# Altium PCB U_I_Meter_WIFI.PcbDoc
Units mm, origin at the board's own origin, x right, y up, seen from the top; angles counter-clockwise.
Board outline 66.83 x 47.73 mm, 2 copper layers (Top Layer, Bottom Layer), stack 1.071 mm thick; 26 components, 17 nets, 120 pads, 16 vias.
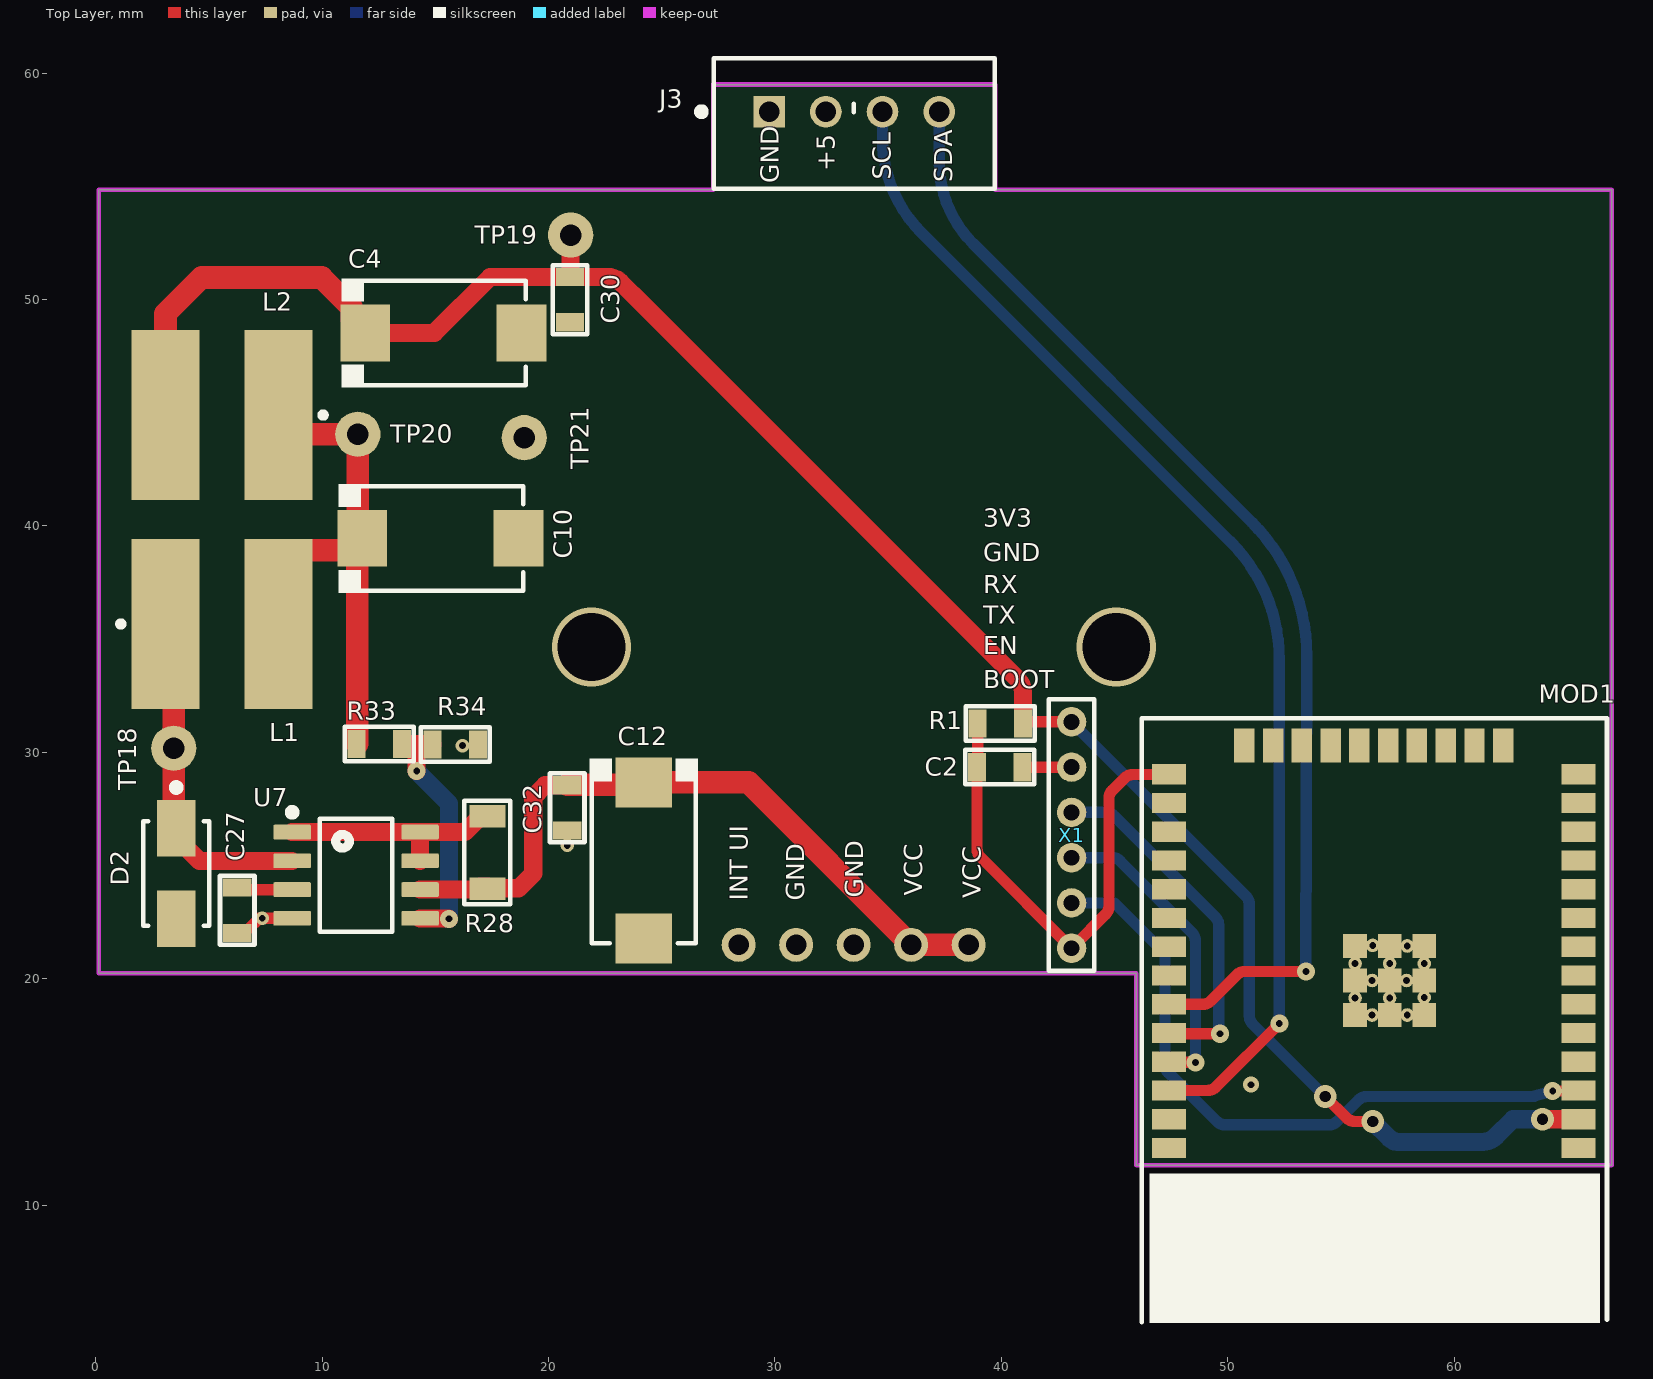
[diagram p0: Top Layer view]
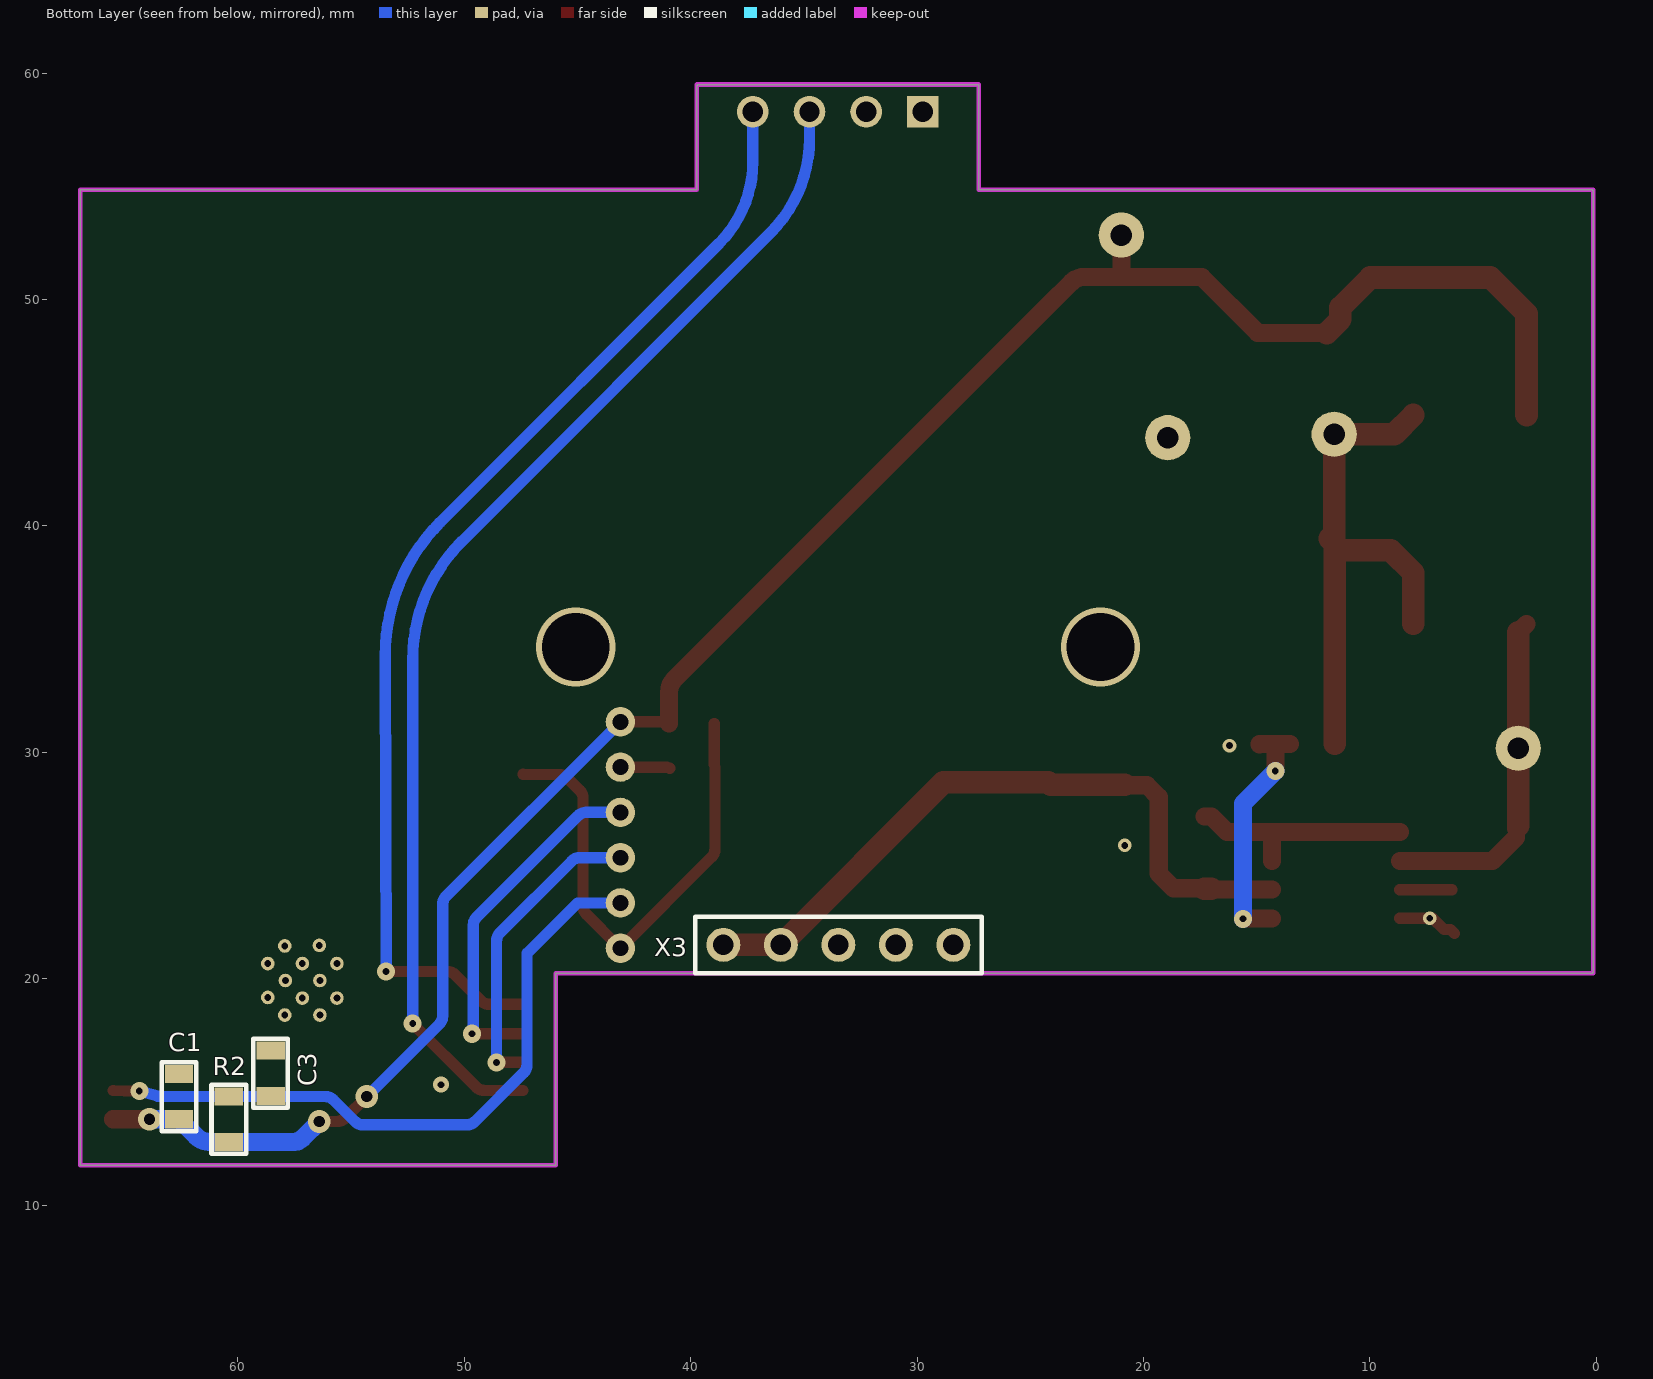
[diagram p1: Bottom Layer view, seen from below]
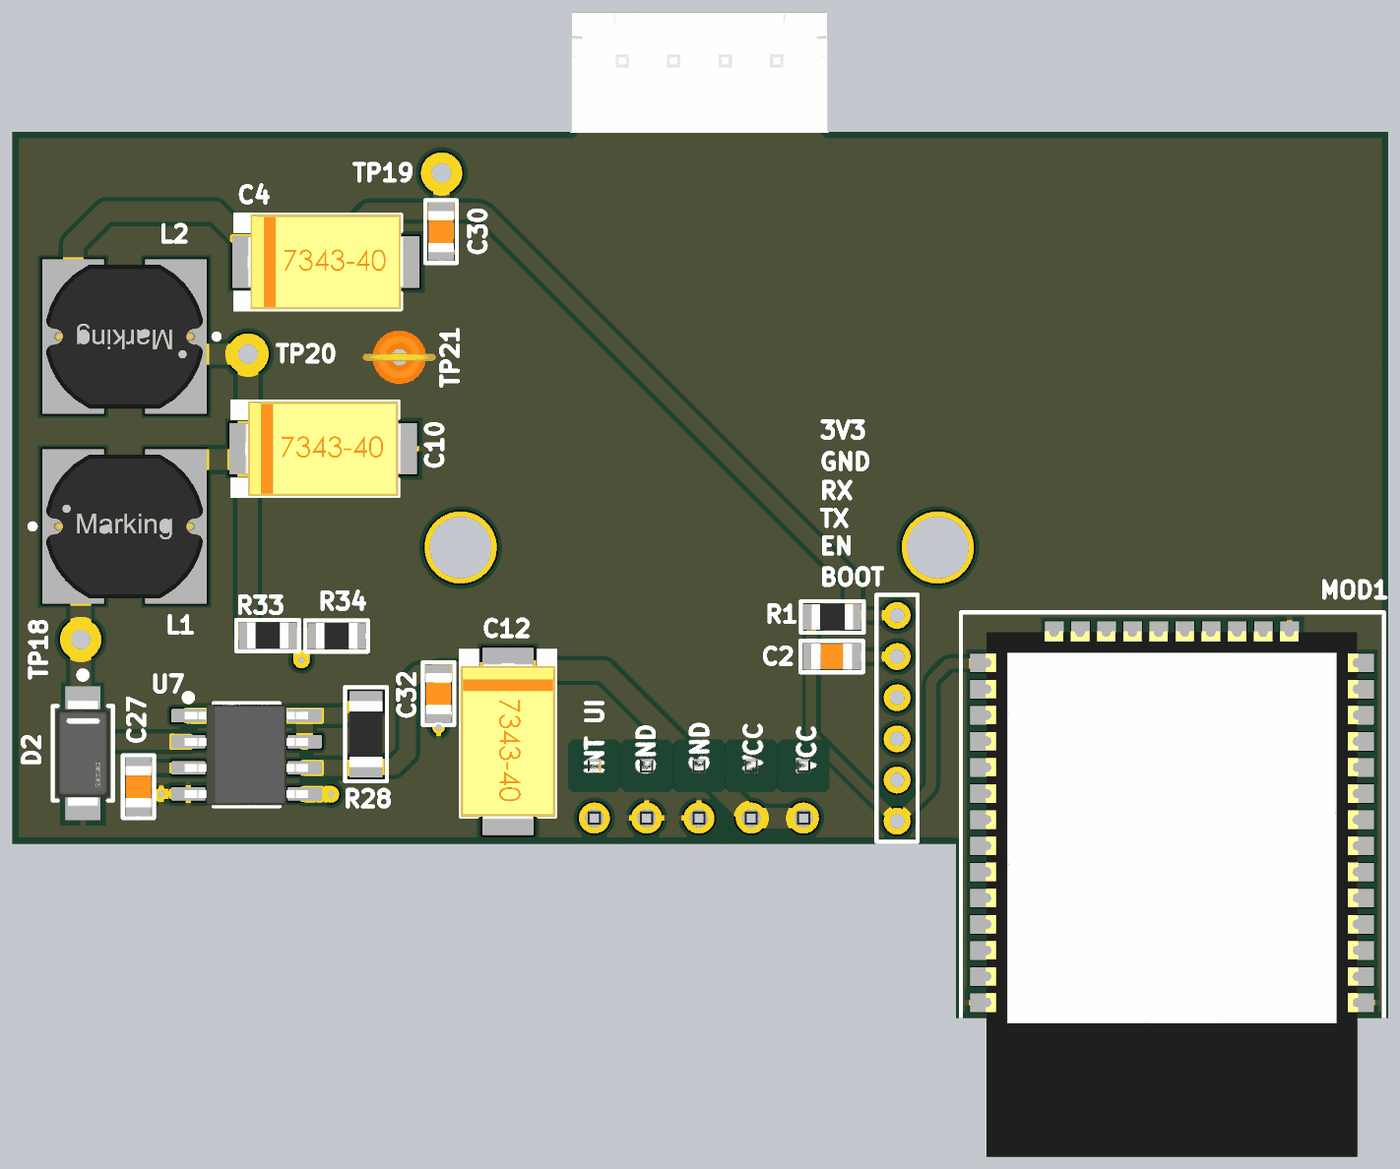
[diagram p2: 3D render of the assembled board from above, using the file's embedded part models]
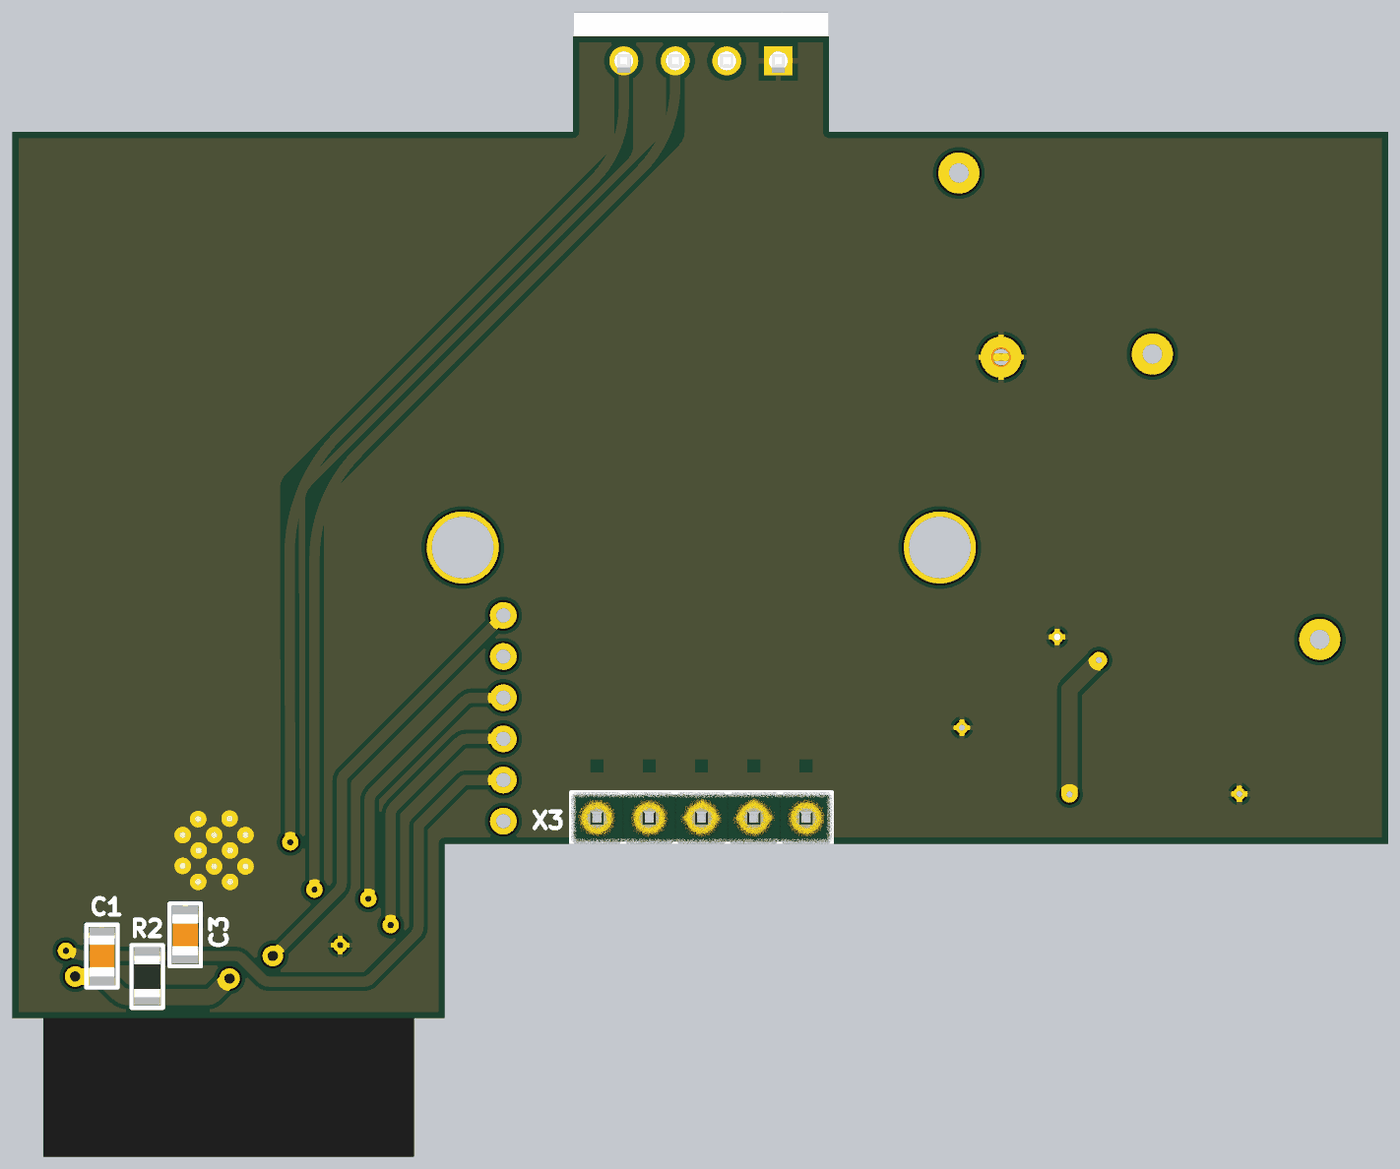
[diagram p3: 3D render of the assembled board from below, using the file's embedded part models]

## Layer stack, top to bottom
Top Solder: solder mask 0.0102, Solder Resist, Dk 3.5
Top Layer: signal copper 0.0356
Dielectric 1: dielectric 1, FR-4, Dk 4.8
Bottom Layer: signal copper 0.0356
Bottom Solder: solder mask 0.0102, Solder Resist, Dk 3.5

## Board outline
0.125,20.25 0.125,54.85 27.275,54.85 27.275,59.5 39.725,59.5 39.725,54.85 66.95,54.85 66.95,11.775 45.95,11.775 45.95,20.25

## Design rules (kind name [scope] priority, off if disabled: settings)
Clearance [All] p1: gap=0.2 ignorepadtopadclearanceinfootprint=FALSE except(0.254: THPad-THPad THPad-Via THPad-Fill THPad-Poly THPad-Region THPad-Text THPad-Hole Via-Via Via-Fill Via-Poly Via-Region Via-Text Via-Hole Fill-Fill Fill-Poly Fill-Region Fill-Text Fill-Hole Poly-Poly Poly-Region Poly-Text Poly-Hole Region-Region Region-Text Region-Hole Text-Text Text-Hole)
ComponentClearance [All] p1: gap=-1 collisioncheckmode=3 verticalgap=0 showdistances=FALSE
Height [All] p1: minheight=-1 maxheight=100 prefheight=12.7
PolygonConnect [All] p1: connectstyle=Relief reliefconductorwidth=0.254 reliefentries=4 polygonreliefangle="90 Angle" airgapwidth=0.254
RoutingVias [All] p1: holewidth=0.711 width=1.27 viastyle="Through Hole" minholewidth=0.711 minwidth=1.27 maxholewidth=0.711 maxwidth=1.27
SolderMaskExpansion [All] p1: expansion=0.102 istentingtop=FALSE
Width [All] p1: maxlimit=10 minlimit=0.254 preferedwidth=0.254 minimp=50.000000 maximp=50.000000 favimp=50.000000
28 further rules are at their usual default settings.

## Components (designator, comment, footprint, x,y, rotation, side; value= is the part's Value field where it differs from the comment)
C1 "0.1uF" CAP-0805 62.597,14.796 r270 bottom
C2 "100nF" CAP-0805 39.925,29.35 r180 top
C3 "100nF" CAP-0805 58.55,15.825 r90 bottom
C4 "100uF_16V" CAP-TAN-D 15.35,48.525 r0 top
C10 "100uF_16V" CAP-TAN-D 15.225,39.45 r0 top
C12 "100uF_16V" CAP-TAN-D 24.2,25.225 r270 top
C27 "470pF" CAP-0805 6.25,23.025 r270 top
C30 "0.1uF" CAP-0805 20.95,50 r90 top
C32 "0.47uF" CAP-0805 20.825,27.55 r270 top
D2 "US1G" US1G_SMA 3.55,24.65 r270 top
J3 "B4B-XH-A(LF)(SN)" B4B-XH-A 33.5,57.775 r180 top
L1 "47µH, 1.17A" WE-PD2_7850 5.575,35.675 r0 top
L2 "47µH, 1.17A" WE-PD2_7850 5.575,44.9 r180 top
MOD1 "MOD-ESP32-WROOM-32E" MOD-ESP32-WROOM-32E 56.45,21.415 r180 top locked
R1 "10K" RES-0805 39.95,31.275 r0 top
R2 "10K" RES-0805 60.4,13.8 r90 bottom
R28 "0.33" RES-1206 17.3,25.575 r90 top
R33 "3.8K" RES-0805 12.525,30.375 r0 top
R34 "1.2K" RES-0805 15.875,30.35 r180 top
TP18 "Test_Point_PCB" Test_Point 3.444,30.181 r90 top
TP19 "Test_Point_PCB" Test_Point 20.975,52.85 r90 top
TP20 "Test_Point_PCB" Test_Point 11.575,44.05 r270 top
TP21 "Test_Point_PCB" Pin_Test_Point(Orange) 18.925,43.9 r90 top
U7 "MC34063" SOIC-8_M 11.5,24.575 r0 top
X1 "CONN-6-PIN" CONN-PLS-6-2.00mm 43.1,31.35 r270 top
X3 "CONN-5-PIN" CONN-PLS-5-2.54_2 28.395,21.5 r0 bottom locked

## Footprints (in the part's own frame and the unit in brackets; to place one, negate y for a bottom-side part, rotate by r counter-clockwise, add the part's x,y. Pads: shape width x height; smd on the part's side, far side on the other; paste and mask are expansions set on the pad)
B4B-XH-A [mm]
  rect 1.4x1.4 hole 0.9 paste-2539.97 mask+0: 1(3.75,-0.525)
  round 1.4 hole 0.9 paste-2539.97 mask+0: 2(1.25,-0.525) 3(-1.25,-0.525) 4(-3.75,-0.525)
  silkscreen extent -6.2,-2.88 6.87,2.88, body extent -6.3,-2.98 6.3,2.98, height 0.25
CAP-0805 [mm]
  rect 0.8x1.25 smd mask+0.015: 1(-1,0) 2(1,0)
  silkscreen extent -1.52,-0.76 1.52,0.76, body extent -1,-0.62 1,0.63, height 0.8
CAP-TAN-D [mm]
  rect 2.2x2.5 smd: 1(-3.45,0) 2(3.45,0)
  silkscreen extent -4.5,-2.4 3.65,2.4, body extent -3.8,-2.3 3.8,2.3, height 4
CONN-PLS-5-2.54_2 [mm]
  round 1.5 hole 0.9: 1(0,0) 2(2.54,0) 3(5.08,0) 4(7.62,0) 5(10.16,0)
  silkscreen extent -1.25,-1.25 11.41,1.25, body extent -1.27,-3.81 11.43,1.27, height 19.54
CONN-PLS-6-2.00mm [mm]
  round 1.3 hole 0.7: 1(0,0) 2(2,0) 3(4,0) 4(6,0) 5(8,0) 6(10,0)
  silkscreen extent -1,-1 11,1
MOD-ESP32-WROOM-32E [mm]
  rect 1.5x0.9 smd paste+0 mask+0.05: 1(-9.05,8.89) 2(-9.05,7.62) 3(-9.05,6.35) 4(-9.05,5.08) 5(-9.05,3.81) 6(-9.05,2.54) 7(-9.05,1.27) 8(-9.05,0) 9(-9.05,-1.27) 10(-9.05,-2.54) 11(-9.05,-3.81) 12(-9.05,-5.08) 13(-9.05,-6.35) 14(-9.05,-7.62) 25(9.05,-7.62) 26(9.05,-6.35) 27(9.05,-5.08) 28(9.05,-3.81) 29(9.05,-2.54) 30(9.05,-1.27) 31(9.05,0) 32(9.05,1.27) 33(9.05,2.54) 34(9.05,3.81) 35(9.05,5.08) 36(9.05,6.35) 37(9.05,7.62) 38(9.05,8.89)
  rect 0.9x1.5 smd paste+0 mask+0.05: 15(-5.715,-8.89) 16(-4.445,-8.89) 17(-3.175,-8.89) 18(-1.905,-8.89) 19(-0.635,-8.89) 20(0.635,-8.89) 21(1.905,-8.89) 22(3.175,-8.89) 23(4.445,-8.89) 24(5.715,-8.89)
  rect 1.05x1.05 smd paste+0 mask+0.05: 39(-2.225,1.49) 39(-2.225,3.015) 39(-2.225,-0.035) 39(-0.7,3.015) 39(-0.7,1.49) 39(-0.7,-0.035) 39(0.825,3.015) 39(0.825,1.49) 39(0.825,-0.035)
  round 0.6 hole 0.3: 39(-2.225,2.24) 39(-2.225,0.74) 39(-1.475,3.015) 39(-1.475,-0.035) 39(-1.45,1.49) 39(-0.7,2.265) 39(-0.7,0.74) 39(0.05,-0.06) 39(0.075,3.015) 39(0.075,1.49) 39(0.825,2.265) 39(0.825,0.74)
  silkscreen extent -10.3,-10.08 10.25,16.62, body extent -9.04,-9.16 9.04,16.38, height 3
Pin_Test_Point(Orange) [mm]
  round 2 hole 0.95: 1(0,0)
  body extent -1.3,-1.78 1.3,1.78, height 6.93
RES-0805 [mm]
  rect 0.8x1.25 smd mask+0.015: 1(-1,0) 2(1,0)
  silkscreen extent -1.52,-0.76 1.52,0.76, body extent -1,-0.62 1,0.63, height 0.6
RES-1206 [mm]
  rect 1x1.6 smd: 1(-1.6,0) 2(1.6,0)
  silkscreen extent -2.29,-1.02 2.29,1.02, body extent -1.6,-0.8 1.6,0.8, height 0.6
SOIC-8_M [mm]
  rrect15% 1.65x0.65 smd: 1(-2.825,1.905) 2(-2.825,0.635) 3(-2.825,-0.635) 4(-2.825,-1.905) 5(2.825,-1.905) 6(2.825,-0.635) 7(2.825,0.635) 8(2.825,1.905)
  silkscreen extent -2.95,-2.5 1.6,2.9, body extent -3,-2.45 3,2.45, height 1.63
Test_Point [mm]
  round 2 hole 0.95: 1(0,0)
US1G_SMA [mm]
  rect 2.5x1.7 smd paste+0 mask+0: 1(-2,0) 2(2,0)
  silkscreen extent -3.92,-1.46 2.3,1.46, body extent -2.6,-1.3 2.6,1.3, height 2.4
WE-PD2_7850 [mm] "SMD Power Inductor, 2-Leads, body 7.8x7mm"
  rect 3x7.5 smd: 1(-2.5,0) 2(2.5,0)
  silkscreen extent -4.59,-0.12 -4.34,0.12, body extent -3.81,-3.5 3.81,3.5, height 4.95

## Part data
C1 C2 C3 C27 C30 C32: library part CAP-NON-POLAR
C4 C10 C12: library part CAP_POL_SMD
L1 L2: library part 744775147, "WE-PD2 SMT Power Inductor, size 7850, 47µH, 1.17A, 0.18Ω", Case/Size Code=7850, DC Resistance=0.134Ω, DC Resistance Max=0.18Ω, Inductance=47µH, Manufacturer="Wurth Elektronik", Operating Temperature Max=125°C, Operating Temperature Min=-40°C, Rated Current=1.17A, Saturation Current=1.24A, Self Resonant Frequency=12MHz, Category="Unshielded Power Inductors", ComponentLink1Description="Website Link", ComponentLink1URL=https://www.we-online.com/redexpert/article/744775147?ad, ComponentLink2Description="Datasheet Link", ComponentLink2URL=https://www.we-online.com/redexpert/spec/744775147?ad, Height=4.95mm, Length=7.8mm, Manufacturer Part Number=744775147, Match Code=WE-PD2, Mount="Surface Mount", Packaging="Tape and Reel", Width=7mm
R1 R2 R28 R34: library part RES-CONST
R33: library part RES-CONST, "10K"
TP18 TP19 TP20 TP21: library part TP_PCB?, "Test_Point"

## Via types
v1: diameter 0.8, hole 0.3, Top Layer to Bottom Layer, 7 vias
v2: diameter 1, hole 0.5, Top Layer to Bottom Layer, 3 vias
v3: diameter 0.6, hole 0.3, Top Layer to Bottom Layer, 3 vias
v4: diameter 3.5, hole 3, Top Layer to Bottom Layer, 2 vias
v5: diameter 0.7, hole 0.3, Top Layer to Bottom Layer, 1 vias

## Nets (pads, with @x,y where several pads share a name; then routed paths per layer and width w, separated by ;. In a path a pad name is that pad's centre, name@x,y a point inside that pad or via, vN(x,y) a via of type N, cw(c..) or ccw(c..) an arc to the next point about the centre after c; other vN are vias at no path point)
3V3: C1.2 C4.1 C30.2 L2.2 MOD1.2 R1.2 R2.1 TP19.1 X1.1 | length 92.4
  Top Layer w0.5: R1.2 41.025,31.35 X1.1 ; v2(54.3,14.8) 55.255,13.845 ccw(c55.607,14.2) 55.606,13.7 v2(56.4,13.7)
  Top Layer w0.8: C4.1 14.95,48.525 17.425,51 C30.2 C30.2@20.962,51 ; TP19.1 20.962,52.837 C30.2@20.962,51 ; R1.2 40.95,32.669 ccw(c40.15,32.669) 40.716,33.234 24.189,49.761 23.184,50.766 ccw(c22.619,50.2) 22.619,51 C30.2@20.962,51 ; v2(63.9,13.8) 63.905,13.795 MOD1.2 MOD1.2@65.15,13.785
  Top Layer w1: L2.2 3.081,44.906 3.081,49.381 4.675,50.975 9.975,50.975 11.3,49.65 11.3,49.125 C4.1
  Bottom Layer w0.5: X1.1 50.804,23.646 cw(c50.45,23.293) 50.95,23.293 50.95,18.357 ccw(c51.45,18.357) 51.096,18.004 v2(54.3,14.8)
  Bottom Layer w0.8: v2(56.4,13.7) 57.154,12.946 ccw(c57.507,13.3) 57.507,12.8 R2.1 61.269,12.8 ccw(c61.269,13.6) 61.835,13.034 C1.2 63.81,13.796 ccw(c63.81,14.596) 63.865,13.798 v2(63.9,13.8)
+5: J3.2
BOOT: C2.2 MOD1.25 R1.1 X1.6 | length 22
  Top Layer w0.5: C2.2 38.925,25.73 ccw(c39.425,25.73) 39.071,25.378 X1.6 ; C2.2@38.95,29.475 R1.1 ; X1.6 43.225,21.475 44.604,22.854 ccw(c44.25,23.207) 44.75,23.207 44.75,27.968 cw(c45.25,27.968) 44.896,28.321 45.454,28.879 cw(c45.807,28.525) 45.807,29.025 47.39,29.025 MOD1.25
EN: C3.1 MOD1.3 R2.2 X1.5 | length 29.9
  Top Layer w0.5: v1(64.35,15.05) 64.957,15.045 ccw(c64.959,15.545) 64.974,15.045 65,15.046 MOD1.3
  Bottom Layer w0.5: X1.5 45,23.35 47.225,21.125 47.225,16.206 ccw(c47.725,16.207) 47.37,15.855 49.53,13.695 ccw(c49.882,14.05) 49.88,13.55 54.468,13.55 ccw(c54.468,14.05) 54.821,13.696 55.779,14.654 cw(c56.132,14.3) 56.132,14.8 57.55,14.8 58.55,14.8 R2.2 63.396,14.8 ccw(c63.396,15.3) 63.532,14.819 v1(64.35,15.05)
GND: C2.1 X1.2 | length 2.2
  Top Layer w0.5: C2.1@40.925,29.3 41.075,29.35 X1.2
GND_III: C1.1 C3.2 C4.2 C10.2 C12.2 C27.2 C30.1 C32.2 D2.2 J3.1 MOD1.1 MOD1.15 MOD1.38 MOD1.39 R34.1 TP21.1 U7.4 X3.2 X3.3 | length 2.7
  Top Layer w0.5: C27.2@6.261,22 6.436,22.175 6.725,22.175 7.22,22.67 U7.4
  other v3: 7.35,22.675 20.828,25.891 16.2,30.3
  other v5: 51.025,15.325
NetC10_1: C10.1 L1.2 L2.1 R33.1 TP20.1 | length 23.8
  Top Layer w1: L1.2 8.075,37.925 9.075,38.925 11.5,38.925 C10.1@11.55,38.975 ; L2.1 8.925,44.05 TP20.1 C10.1@11.575,39.45 ; R33.1@11.55,30.375 C10.1@11.55,38.975 ; C10.1 11.55,39.225 C10.1@11.55,38.975
NetC27_1: C27.1 U7.3 | length 2.3
  Top Layer w0.5: C27.1@6.372,23.94 U7.3
NetD2_1: D2.1 L1.1 TP18.1 U7.2 | length 14.8
  Top Layer w0.8: L1.1 L1.1@3.444,35.306 ; D2.1@3.444,26.756 D2.1 ; D2.1@3.55,26.25 4.59,25.21 U7.2
  Top Layer w1: D2.1@3.444,26.756 TP18.1 L1.1@3.444,35.306
NetR28_2: R28.2 U7.1 U7.7 U7.8 | length 10.2
  Top Layer w0.8: U7.1 U7.8 ; U7.7 U7.8 ; R28.2 17,27.175 16.305,26.48 U7.8
NetR33_2: R33.2 R34.2 U7.5 | length 10.9
  Top Layer w0.8: R33.2 13.525,30.362 14.175,30.362 14.875,30.362 R34.2 ; v1(14.175,29.175) 14.175,30.337 ; U7.5 15.58,22.67 v1(15.6,22.65)
  Bottom Layer w0.8: v1(14.175,29.175) 15.6,27.75 v1(15.6,22.65)
NetX3_1: X3.1
RX0: MOD1.34 X1.3 | length 15.7
  Top Layer w0.5: MOD1.34 47.43,17.575 v1(49.66,17.575)
  Bottom Layer w0.5: X1.3 44.618,27.35 cw(c44.618,26.85) 44.971,27.204 49.454,22.721 cw(c49.1,22.368) 49.6,22.368 49.6,17.635 v1(49.66,17.575)
SCL: J3.3 MOD1.36 | length 53
  Top Layer w0.5: MOD1.36 49.11,15.065 ccw(c49.11,15.565) 49.463,15.211 v1(52.277,18.025)
  Bottom Layer w0.5: J3.3 34.75,57.106 ccw(c40.628,57.11) 36.461,52.964 36.462,52.963 50.126,39.299 50.128,39.297 cw(c44.895,34.09) 52.277,34.09 52.277,34.088 v1(52.277,18.025)
SDA: J3.4 MOD1.33 | length 50.7
  Top Layer w0.5: MOD1.33 48.893,18.875 ccw(c48.893,19.375) 49.246,19.021 50.404,20.179 cw(c50.757,19.825) 50.757,20.325 v1(53.45,20.325)
  Bottom Layer w0.5: J3.4 37.25,56.078 37.25,56.077 ccw(c42.363,56.093) 38.734,52.491 38.736,52.489 51.051,40.174 51.055,40.17 cw(c45.171,34.29) 53.489,34.267 53.489,34.265 v1(53.45,20.325)
TX0: MOD1.35 X1.4 | length 13.6
  Top Layer w0.5: MOD1.35 47.417,16.318 48.558,16.318 v1(48.575,16.3)
  Bottom Layer w0.5: X1.4 44.893,25.35 cw(c44.893,24.85) 45.246,25.204 48.429,22.021 cw(c48.075,21.668) 48.575,21.668 v1(48.575,16.3)
VCC: C12.1 C32.1 R28.1 U7.6 X3.4 X3.5 | length 31.1
  Top Layer w0.8: U7.6 R28.1@16.965,23.94 ; R28.1 17.324,23.999 18.674,23.999 19.325,24.65 19.325,28.025 19.85,28.55 C32.1
  Top Layer w1: R28.1@17,23.975 R28.1 ; C32.1@20.825,28.575 24.1,28.575 C12.1 28.84,28.675 X3.4 X3.5
pads on no net: MOD1.4 MOD1.5 MOD1.6 MOD1.7 MOD1.8 MOD1.9 MOD1.10 MOD1.11 MOD1.12 MOD1.13 MOD1.14 MOD1.16 MOD1.17 MOD1.18 MOD1.19 MOD1.20 MOD1.21 MOD1.22 MOD1.23 MOD1.24 MOD1.26 MOD1.27 MOD1.28 MOD1.29 MOD1.30 MOD1.31 MOD1.32 MOD1.37
copper on no net:
  other v4: 21.9,34.65 45.075,34.65

## Polygon pours and split planes (outlines as drawn)
GND_III on Top Layer "NONET_L-01_P-001" (solid, shelved, pour order 4): 0.125,54.85 27.275,54.85 27.25,54.875 27.25,59.475 27.275,59.5 39.725,59.5 39.725,54.85 66.95,54.85 66.95,11.775 45.95,11.775 45.95,20.25 0.125,20.25
GND_III on Bottom Layer "NONET_L-01_P-001" (solid, shelved, pour order 5): 0.125,54.85 27.275,54.85 27.25,54.875 27.25,59.475 27.275,59.5 39.725,59.5 39.725,54.85 66.95,54.85 66.95,11.775 45.95,11.775 45.95,20.25 0.125,20.25

## Keep-outs
Keep-Out Layer:
  lines w0.2: 0.125,20.25 0.125,54.85 27.275,54.85 27.275,59.5 39.725,59.5 39.725,54.85 66.95,54.85 66.95,37.637 66.95,28.763 66.95,20.262 66.95,11.775 45.95,11.775 45.95,20.25 0.125,20.25

## Silkscreen, mask and mechanical layers (free items; w line width, h text height)
Top Overlay:
  lines w0.2: 33.475,58.275 33.475,58.65
  text "+5" at 32.646,55.679 h0.8 r90
  text "SCL" at 35.121,55.304 h0.8 r90
  text "SDA" at 37.821,55.179 h0.8 r90
  text "GND" at 30.171,55.129 h0.8 r90
  text "3V3" at 39.204,39.967 h0.8
  text "GND" at 39.204,38.437 h0.8
  text "RX" at 39.204,37.029 h0.8
  text "TX" at 39.204,35.679 h0.8
  text "EN" at 39.204,34.342 h0.8
  text "BOOT" at 39.204,32.829 h0.8
  text "VCC" at 36.496,23.679 h0.8 r90
  text "GND" at 33.896,23.579 h0.8 r90
  text "VCC" at 39.096,23.554 h0.8 r90
  text "INT UI" at 28.796,23.454 h0.8 r90
  text "GND" at 31.296,23.454 h0.8 r90